# Altium PCB LM317.pcbdoc
Units mm, origin at the board's own origin, x right, y up, seen from the top; angles counter-clockwise.
Board outline 41.21 x 32.5 mm, 2 copper layers (Top Layer, Bottom Layer); 1 components, 0 nets, 3 pads, 0 vias.
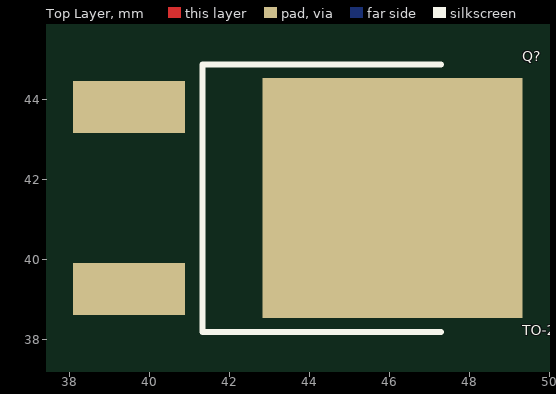
[diagram p0: Top Layer view]
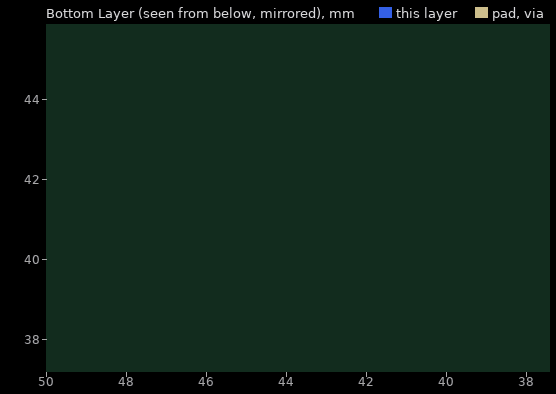
[diagram p1: Bottom Layer view, seen from below]

## Layer stack, top to bottom
Top Layer: signal copper (thickness not stored)
Dielectric: dielectric 0.32, FR-4, Dk 4.8
Bottom Layer: signal copper (thickness not stored)

## Board outline
66.606,25.4 25.4,25.4 25.4,57.899 66.606,57.899

## Components (designator, comment, footprint, x,y, rotation, side; value= is the part's Value field where it differs from the comment)
Q? "TO-252-2_L6.6-W6.1-P4.57-LS9.9-TL-CW" TO-252-2_L6.6-W6.1-P4.57-LS9.9-TL-CW 43.717,41.522 r0 top

## Footprints (in the part's own frame and the unit in brackets; to place one, negate y for a bottom-side part, rotate by r counter-clockwise, add the part's x,y. Pads: shape width x height; smd on the part's side, far side on the other; paste and mask are expansions set on the pad)
TO-252-2_L6.6-W6.1-P4.57-LS9.9-TL-CW [mm]
  rect 2.8x1.3 smd paste+0 mask+0.051: 1(-4.217,2.279) 3(-4.217,-2.266)
  rect 6.5x6 smd paste+0 mask+0.051: 2(2.367,0.007)
  silkscreen extent -2.38,-3.35 3.59,3.35

## Nets (pads, with @x,y where several pads share a name; then routed paths per layer and width w, separated by ;. In a path a pad name is that pad's centre, name@x,y a point inside that pad or via, vN(x,y) a via of type N, cw(c..) or ccw(c..) an arc to the next point about the centre after c; other vN are vias at no path point)
pads on no net: Q?.1 Q?.2 Q?.3